# Altium PCB MacroPlay.PcbDoc
Units mm, origin at the board's own origin, x right, y up, seen from the top; angles counter-clockwise.
Board outline 96 x 80 mm, 2 copper layers (Top Layer, Bottom Layer), stack 1.569 mm thick; 89 components, 46 nets, 325 pads, 39 vias.
Unrouted connection lines stored in the file: 18.
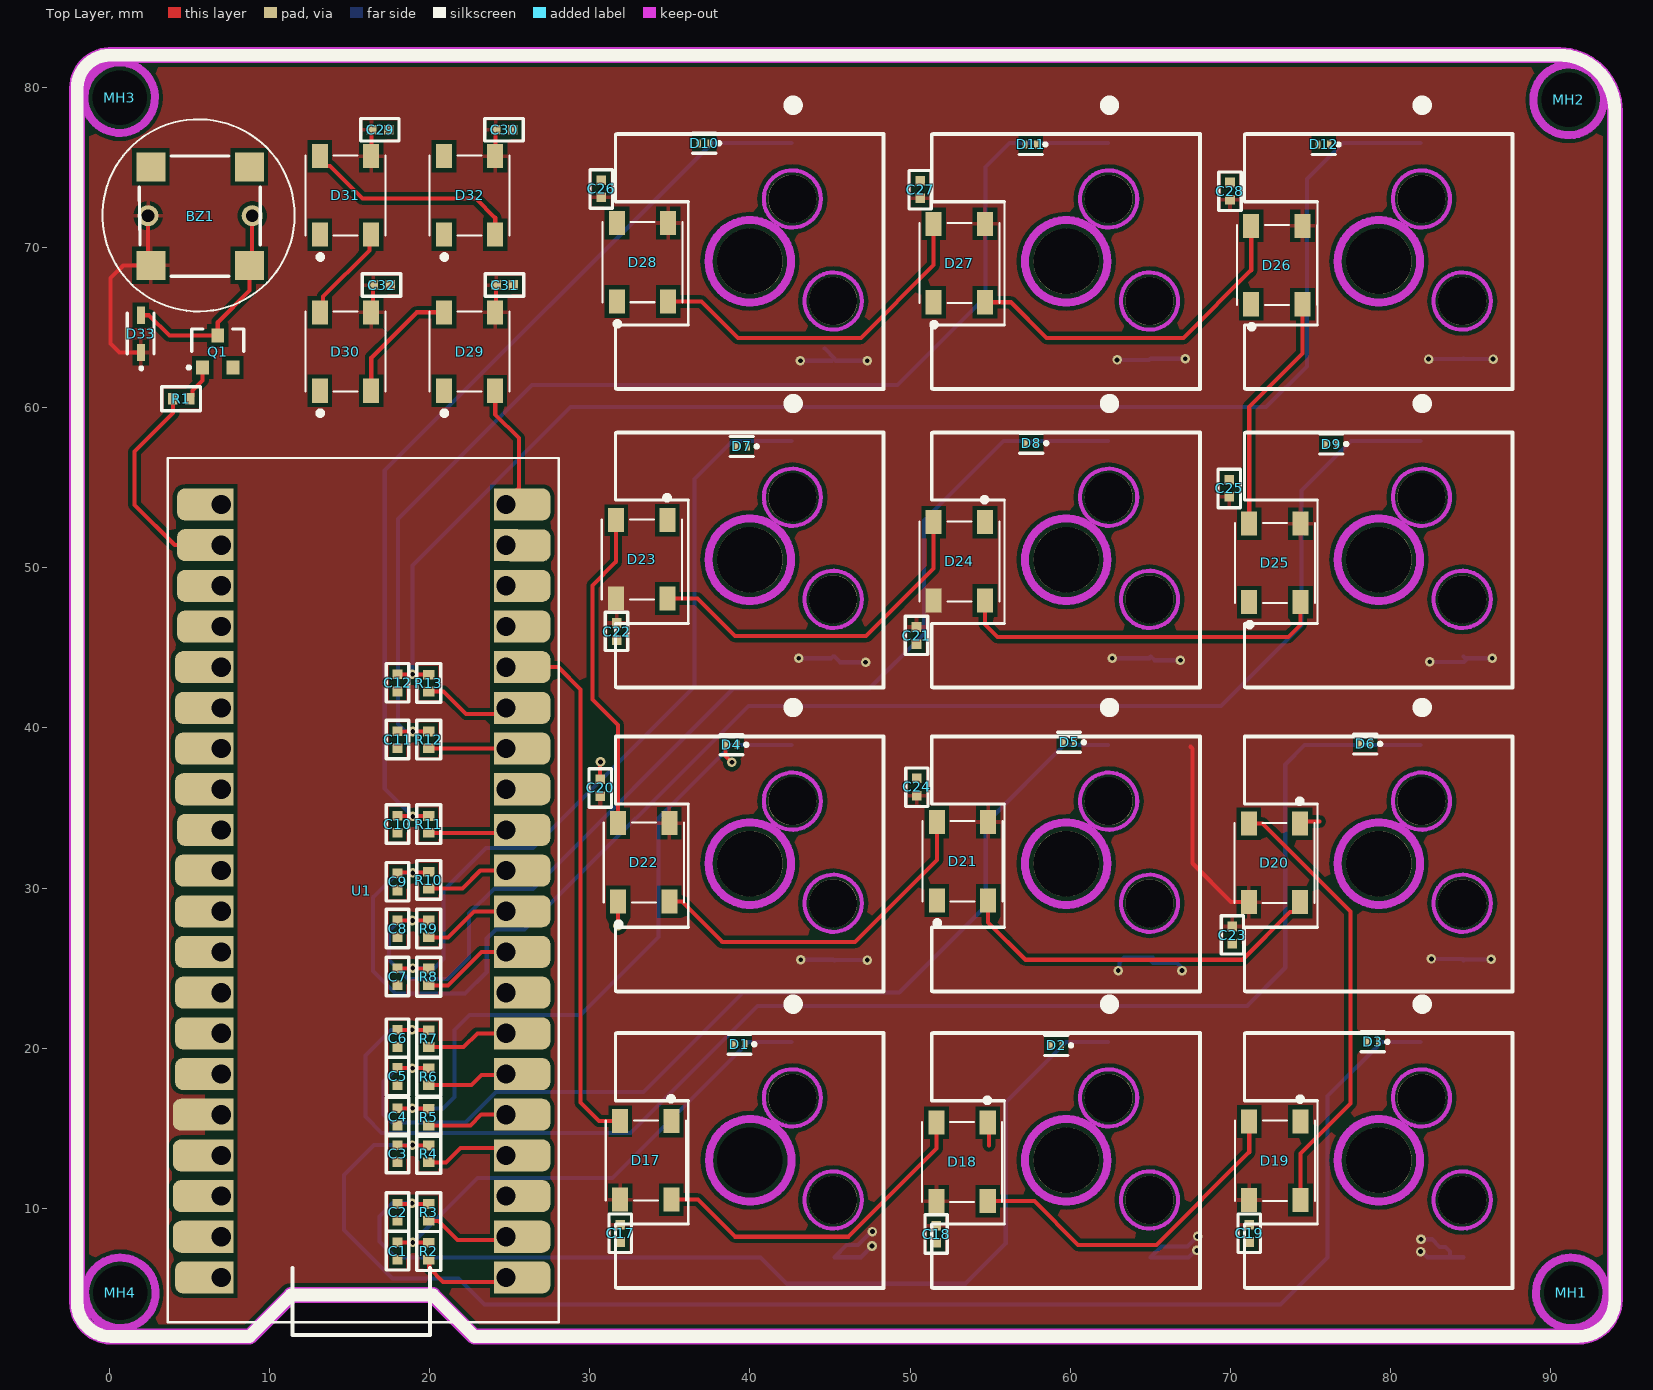
[diagram p0: Top Layer view]
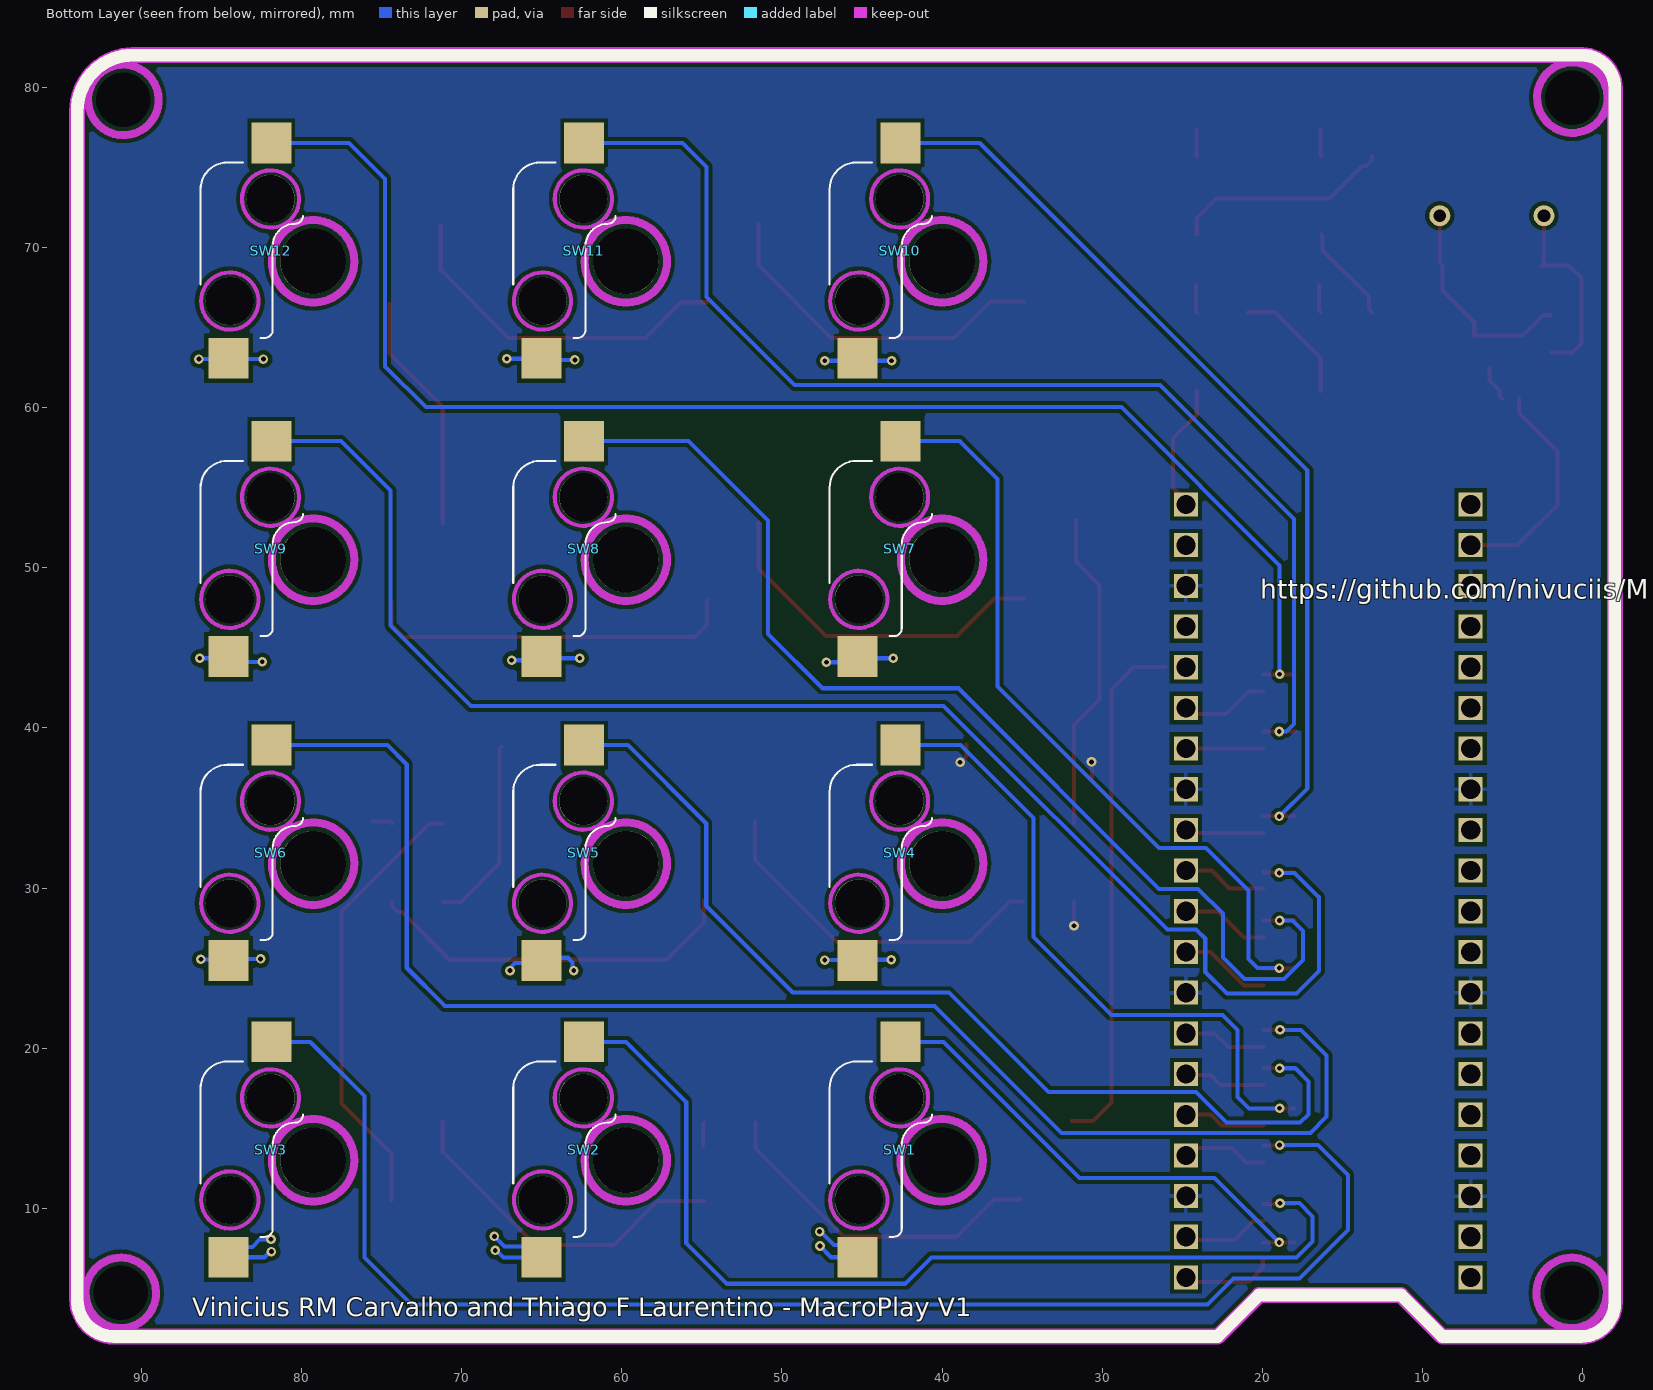
[diagram p1: Bottom Layer view, seen from below]

## Layer stack, top to bottom
Top Solder: solder mask 0.0102, Solder Resist, Dk 3.5
Top Layer: signal copper 0.035
Dielectric 1: core 1.4986, Core-043, Dk 4.3
Bottom Layer: signal copper 0.035
Bottom Solder: solder mask 0.0102, Solder Resist, Dk 3.5

## Board outline
0.125,2 7,2 8.766,2.001 11.355,4.591 20.209,4.591 22.799,2 25,2 91.7,2 ccw(c91.7,4.3) 94,4.3 94,78.525 ccw(c90.525,78.525) 90.525,82 0.05,82 ccw(c0.05,79.95) -2,79.95 -2,4.125 ccw(c0.125,4.125)

## Design rules (kind name [scope] priority, off if disabled: settings)
Clearance [All] p1: gap=0.254 ignorepadtopadclearanceinfootprint=FALSE except(0: Arc-Hole Track-Hole SMDPad-Hole THPad-Hole Via-Hole Fill-Hole Poly-Hole Region-Hole Text-Hole)
ComponentClearance TestPoints [HasFootprint('Test Point') vs HasFootprint('Test Point')] p1: gap=1.016 collisioncheckmode=3 verticalgap=0.254 showdistances=FALSE
ComponentClearance [All] p2: gap=0.254 collisioncheckmode=3 verticalgap=0.254 showdistances=FALSE
HoleSize [All] p1: absolutevalues=TRUE maxlimit=10 minlimit=0.025 maxpercent=80.000 minpercent=20.000
PolygonConnect "Relief 2312" [(HasFootprint('C2312') OR HasFootprint('R2312')OR HasFootprint('L2312')) AND IsPad vs IsPolygon] p1: thpad.connectstyle=Relief thpad.reliefconductorwidth=1.5 thpad.reliefentries=4 thpad.polygonreliefangle="90 Angle" thpad.airgapwidth=0.2 smdpad.connectstyle=Relief smdpad.reliefconductorwidth=1.5 smdpad.reliefentries=4 smdpad.polygonreliefangle="90 Angle" smdpad.airgapwidth=0.2 via.connectstyle=Direct via.reliefconductorwidth=0.254 via.reliefentries=4 via.polygonreliefangle="90 Angle" via.airgapwidth=0.254
PolygonConnect "Relief 1206" [(HasFootprint('C1206') OR HasFootprint('R1206') or HasFootprint('L1206')) AND IsPad vs IsPolygon] p2: thpad.connectstyle=Relief thpad.reliefconductorwidth=1.1 thpad.reliefentries=4 thpad.polygonreliefangle="90 Angle" thpad.airgapwidth=0.2 smdpad.connectstyle=Relief smdpad.reliefconductorwidth=1.1 smdpad.reliefentries=4 smdpad.polygonreliefangle="90 Angle" smdpad.airgapwidth=0.2 via.connectstyle=Direct via.reliefconductorwidth=0.254 via.reliefentries=4 via.polygonreliefangle="90 Angle" via.airgapwidth=0.254
PolygonConnect "Relief 0806" [(HasFootprint('C0805') OR HasFootprint('R0805') OR HasFootprint('L0805')) AND IsPad vs IsPolygon] p3: thpad.connectstyle=Relief thpad.reliefconductorwidth=0.7 thpad.reliefentries=4 thpad.polygonreliefangle="90 Angle" thpad.airgapwidth=0.254 smdpad.connectstyle=Relief smdpad.reliefconductorwidth=0.7 smdpad.reliefentries=4 smdpad.polygonreliefangle="90 Angle" smdpad.airgapwidth=0.254 via.connectstyle=Direct via.reliefconductorwidth=0.254 via.reliefentries=4 via.polygonreliefangle="90 Angle" via.airgapwidth=0.254
PolygonConnect "Relief 0603" [(HasFootprint('C0603') OR HasFootprint('R0603') OR HasFootprint('L0603')) AND IsPad vs IsPolygon] p4: thpad.connectstyle=Relief thpad.reliefconductorwidth=0.5 thpad.reliefentries=4 thpad.polygonreliefangle="90 Angle" thpad.airgapwidth=0.254 smdpad.connectstyle=Relief smdpad.reliefconductorwidth=0.5 smdpad.reliefentries=4 smdpad.polygonreliefangle="90 Angle" smdpad.airgapwidth=0.254 via.connectstyle=Direct via.reliefconductorwidth=0.254 via.reliefentries=4 via.polygonreliefangle="90 Angle" via.airgapwidth=0.254
PolygonConnect "Relief 0402" [(HasFootprint('C0402') OR HasFootprint('R0402') OR HasFootprint('L0402')) AND IsPad vs IsPolygon] p5: thpad.connectstyle=Relief thpad.reliefconductorwidth=0.3 thpad.reliefentries=4 thpad.polygonreliefangle="90 Angle" thpad.airgapwidth=0.127 smdpad.connectstyle=Relief smdpad.reliefconductorwidth=0.3 smdpad.reliefentries=4 smdpad.polygonreliefangle="90 Angle" smdpad.airgapwidth=0.127 via.connectstyle=Direct via.reliefconductorwidth=0.254 via.reliefentries=4 via.polygonreliefangle="90 Angle" via.airgapwidth=0.254
PolygonConnect [All] p6: thpad.connectstyle=Relief thpad.reliefconductorwidth=0.254 thpad.reliefentries=4 thpad.polygonreliefangle="90 Angle" thpad.airgapwidth=0.254 smdpad.connectstyle=Relief smdpad.reliefconductorwidth=0.254 smdpad.reliefentries=4 smdpad.polygonreliefangle="90 Angle" smdpad.airgapwidth=0.254 via.connectstyle=Direct via.reliefconductorwidth=0.254 via.reliefentries=4 via.polygonreliefangle="90 Angle" via.airgapwidth=0.254
RoutingVias [All] p1: holewidth=0.3 width=0.6 viastyle="Through Hole" minholewidth=0.3 minwidth=0.6 maxholewidth=8 maxwidth=10
SilkToSilkClearance SilkToSilkClearance_textOnTop [OnLayer('Bottom Overlay') vs (IsText OR IsTrack) AND OnLayer('Bottom Overlay')] p1: silktosilkclearance=0
SilkToSilkClearance [All] p2: silktosilkclearance=0.254
SilkToSolderMaskClearance [IsPad] p1: minsilkscreentomaskgap=0.16 clearancetoexposedcopper=TRUE
SolderMaskExpansion [All] p1: expansion=0.102 istentingtop=FALSE
SupplyNets "Schematic Supply Nets_1" [InNet('+3V3')] p1: voltage=0.000
SupplyNets "Schematic Supply Nets" [InNet('GND')] p2: voltage=0.000
Width [All] p1: maxlimit=0.254 minlimit=0.254 preferedwidth=0.254
26 further rules are at their usual default settings.

## Classes and differential pairs
component class "[05] - LEDS": C17 C18 C19 C20 C21 C22 C23 C24 C25 C26 C27 C28 C29 C30 C31 C32 D17 D18 D19 D20 D21 D22 D23 D24 D25 D26 D27 D28 D29 D30 D31 D32
component class "[04] - KEYS": C1 C2 C3 C4 C5 C6 C7 C8 C9 C10 C11 C12 D1 D2 D3 D4 D5 D6 D7 D8 D9 D10 D11 D12 R2 R3 R4 R5 R6 R7 R8 R9 R10 R11 R12 R13 SW1 SW2 SW3 SW4 SW5 SW6 SW7 SW8 SW9 SW10 SW11 SW12
component class "[03] - MICROCONTROLLER": BZ1 D33 Q1 R1 U1

## Components (designator, comment, footprint, x,y, rotation, side; value= is the part's Value field where it differs from the comment)
BZ1 "CMT-7525-80-SMT-TR" CMT752580SMTTR 5.65,71.95 r90 top
C1 "1µF/16V" "C0402 - IRON SOLDERING" 18,7.35 r90 top value=1uF
C2 "1µF/16V" "C0402 - IRON SOLDERING" 18,9.775 r90 top value=1uF
C3 "1µF/16V" "C0402 - IRON SOLDERING" 18,13.425 r90 top value=1uF
C4 "1µF/16V" "C0402 - IRON SOLDERING" 18,15.725 r90 top value=1uF
C5 "1µF/16V" "C0402 - IRON SOLDERING" 18,18.25 r90 top value=1uF
C6 "1µF/16V" "C0402 - IRON SOLDERING" 18,20.625 r90 top value=1uF
C7 "1µF/16V" "C0402 - IRON SOLDERING" 18,24.475 r90 top value=1uF
C8 "1µF/16V" "C0402 - IRON SOLDERING" 18,27.475 r90 top value=1uF
C9 "1µF/16V" "C0402 - IRON SOLDERING" 18,30.4 r90 top value=1uF
C10 "1µF/16V" "C0402 - IRON SOLDERING" 18,34 r90 top value=1uF
C11 "1µF/16V" "C0402 - IRON SOLDERING" 18,39.275 r90 top value=1uF
C12 "1µF/16V" "C0402 - IRON SOLDERING" 18,42.825 r90 top value=1uF
C17 "100nF/10V" "C0402 - IRON SOLDERING" 31.9,8.45 r90 top value=100nF
C18 "100nF/10V" "C0402 - IRON SOLDERING" 51.625,8.4 r90 top value=100nF
C19 "100nF/10V" "C0402 - IRON SOLDERING" 71.175,8.45 r90 top value=100nF
C20 "100nF/10V" "C0402 - IRON SOLDERING" 30.65,36.25 r270 top value=100nF
C21 "100nF/10V" "C0402 - IRON SOLDERING" 50.4,45.775 r90 top value=100nF
C22 "100nF/10V" "C0402 - IRON SOLDERING" 31.675,46.025 r90 top value=100nF
C23 "100nF/10V" "C0402 - IRON SOLDERING" 70.125,27.075 r90 top value=100nF
C24 "100nF/10V" "C0402 - IRON SOLDERING" 50.425,36.3 r270 top value=100nF
C25 "100nF/10V" "C0402 - IRON SOLDERING" 69.925,54.95 r270 top value=100nF
C26 "100nF/10V" "C0402 - IRON SOLDERING" 30.725,73.65 r270 top value=100nF
C27 "100nF/10V" "C0402 - IRON SOLDERING" 50.625,73.6 r270 top value=100nF
C28 "100nF/10V" "C0402 - IRON SOLDERING" 69.975,73.5 r270 top value=100nF
C29 "100nF/10V" "C0402 - IRON SOLDERING" 16.9,77.35 r180 top value=100nF
C30 "100nF/10V" "C0402 - IRON SOLDERING" 24.65,77.35 r180 top value=100nF
C31 "100nF/10V" "C0402 - IRON SOLDERING" 24.675,67.65 r180 top value=100nF
C32 "100nF/10V" "C0402 - IRON SOLDERING" 17,67.65 r180 top value=100nF
D1 "ESD321DPYR" ESD321DPYR 39.35,20.25 r180 top
D2 "ESD321DPYR" ESD321DPYR 59.125,20.175 r180 top
D3 "ESD321DPYR" ESD321DPYR 78.875,20.4 r180 top
D4 "ESD321DPYR" ESD321DPYR 38.85,38.95 r180 top
D5 "ESD321DPYR" ESD321DPYR 59.925,39.1 r180 top
D6 "ESD321DPYR" ESD321DPYR 78.425,39 r180 top
D7 "ESD321DPYR" ESD321DPYR 39.5,57.575 r180 top
D8 "ESD321DPYR" ESD321DPYR 57.575,57.775 r180 top
D9 "ESD321DPYR" ESD321DPYR 76.3,57.725 r180 top
D10 "ESD321DPYR" ESD321DPYR 37.15,76.5 r180 top
D11 "ESD321DPYR" ESD321DPYR 57.525,76.425 r180 top
D12 "ESD321DPYR" ESD321DPYR 75.825,76.425 r180 top
D17 "FZ2812-5050" LED_FZ2812-5050 33.5,13 r270 top locked
D18 "FZ2812-5050" LED_FZ2812-5050 53.25,12.9 r270 top locked
D19 "FZ2812-5050" LED_FZ2812-5050 72.775,12.975 r270 top locked
D20 "FZ2812-5050" LED_FZ2812-5050 72.75,31.575 r270 top
D21 "FZ2812-5050" LED_FZ2812-5050 53.275,31.675 r90 top
D22 "FZ2812-5050" LED_FZ2812-5050 33.375,31.6 r90 top
D23 "FZ2812-5050" LED_FZ2812-5050 33.25,50.525 r270 top
D24 "FZ2812-5050" LED_FZ2812-5050 53.075,50.4 r270 top
D25 "FZ2812-5050" LED_FZ2812-5050 72.775,50.3 r90 top
D26 "FZ2812-5050" LED_FZ2812-5050 72.9,68.9 r90 top
D27 "FZ2812-5050" LED_FZ2812-5050 53.075,69.025 r90 top
D28 "FZ2812-5050" LED_FZ2812-5050 33.3,69.075 r90 top
D29 "FZ2812-5050" LED_FZ2812-5050 22.5,63.5 r90 top
D30 "FZ2812-5050" LED_FZ2812-5050 14.75,63.5 r90 top
D31 "FZ2812-5050" LED_FZ2812-5050 14.75,73.25 r90 top
D32 "FZ2812-5050" LED_FZ2812-5050 22.5,73.25 r90 top
D33 "1N4148WS-7-F" SOD2513X120N 1.975,64.6 r90 top
MH1 "MH_7.4MMC_3.2MMD" MH_7.4MMC_3.2MMD#1 91.275,4.725 r0 top
MH2 "MH_7.4MMC_3.2MMD" MH_7.4MMC_3.2MMD#2 93.941,79.204 r0 top
MH3 "MH_7.4MMC_3.2MMD" MH_7.4MMC_3.2MMD#3 1.9,81.875 r0 top
MH4 "MH_7.4MMC_3.2MMD" MH_7.4MMC_3.2MMD#4 -0.225,5.8 r0 top
Q1 "BC848BLT1G" SOT-23-3 6.775,63.5 r90 top
R1 "200R" "R0402 - IRONSOLDER" 4.5,60.55 r0 top
R2 "10K" "R0402 - IRONSOLDER" 19.95,7.325 r270 top value=10kR
R3 "10K" "R0402 - IRONSOLDER" 19.95,9.75 r270 top value=10kR
R4 "10K" "R0402 - IRONSOLDER" 19.95,13.4 r270 top value=10kR
R5 "10K" "R0402 - IRONSOLDER" 19.95,15.7 r270 top value=10kR
R6 "10K" "R0402 - IRONSOLDER" 19.95,18.225 r270 top value=10kR
R7 "10K" "R0402 - IRONSOLDER" 19.95,20.6 r270 top value=10kR
R8 "10K" "R0402 - IRONSOLDER" 19.95,24.45 r270 top value=10kR
R9 "10K" "R0402 - IRONSOLDER" 19.95,27.45 r270 top value=10kR
R10 "10K" "R0402 - IRONSOLDER" 19.95,30.5 r270 top value=10kR
R11 "10K" "R0402 - IRONSOLDER" 19.95,33.975 r270 top value=10kR
R12 "10K" "R0402 - IRONSOLDER" 19.95,39.25 r270 top value=10kR
R13 "10K" "R0402 - IRONSOLDER" 19.95,42.8 r270 top value=10kR
SW1 "PG151101S11" SW_PG151101S11#1 43.925,13.675 r90 top locked
SW2 "PG151101S11" SW_PG151101S11#2 63.675,13.675 r90 top locked
SW3 "PG151101S11" SW_PG151101S11#2 83.2,13.675 r90 top locked
SW4 "PG151101S11" SW_PG151101S11#2 43.925,32.2 r90 top locked
SW5 "PG151101S11" SW_PG151101S11#2 63.675,32.2 r90 top locked
SW6 "PG151101S11" SW_PG151101S11#2 83.2,32.2 r90 top locked
SW7 "PG151101S11" SW_PG151101S11#2 43.925,51.175 r90 top locked
SW8 "PG151101S11" SW_PG151101S11#2 63.675,51.175 r90 top locked
SW9 "PG151101S11" SW_PG151101S11#2 83.2,51.175 r90 top locked
SW10 "PG151101S11" SW_PG151101S11#2 43.925,69.8 r90 top locked
SW11 "PG151101S11" SW_PG151101S11#2 63.675,69.8 r90 top locked
SW12 "PG151101S11" SW_PG151101S11#2 83.2,69.8 r90 top locked
U1 "RASPBERRY_PI_PICO" RASPBERRY_PI_PICO 15.89,28.55 r180 top locked

## Footprints (in the part's own frame and the unit in brackets; to place one, negate y for a bottom-side part, rotate by r counter-clockwise, add the part's x,y. Pads: shape width x height; smd on the part's side, far side on the other; paste and mask are expansions set on the pad)
"C0402 - IRON SOLDERING" [mm] "C0402 but easier to solder with iron solder instead of an furnace or heat bed"
  rect 0.6x0.6 smd mask+0: 1(-0.55,0) 2(0.525,0)
  silkscreen extent -1.2,-0.7 1.2,0.7, body extent -0.5,-0.25 0.5,0.25, height 0.51
CMT752580SMTTR [mm]
  rect 1.8x1.8 smd mask+0.08: 1(-3.075,3.05) 2(-3.075,-3.1) 3(3.075,-3.1) 4(3.075,3.05)
  round 1.308 hole 0.8 mask+0.102: 1(0.03,3.224) 2(0.03,-3.276)
  silkscreen extent -5.95,-5.92 6.05,6.07, body extent -3.72,-3.8 3.78,3.7, height 2.5
ESD321DPYR [mm]
  rect 0.3x0.5 smd mask+0.051: 1(-0.35,0) 2(0.35,0)
  silkscreen extent -1.02,-0.63 0.72,0.63, body extent -0.5,-0.3 0.5,0.3, height 0.45
LED_FZ2812-5050 [mm]
  rect 1.5x1 smd mask+0.08: 1(-2.45,1.6) 2(-2.45,-1.6) 3(2.45,-1.6) 4(2.45,1.6)
  silkscreen extent -3.95,-2.5 2.5,2.5, body extent -2.7,-2.5 2.65,2.45, height 1.5
MH_7.4MMC_3.2MMD#1 [mm]
  round 0 hole 3.4 unplated: ""(0,0)
MH_7.4MMC_3.2MMD#2 [mm]
  round 0 hole 3.4 unplated: ""(-2.825,0)
MH_7.4MMC_3.2MMD#3 [mm]
  round 0 hole 3.4 unplated: ""(-1.25,-2.525)
MH_7.4MMC_3.2MMD#4 [mm]
  round 0 hole 3.4 unplated: ""(0.925,-1.075)
"R0402 - IRONSOLDER" [mm] "R0402 but easier to solder with iron solder instead of an furnace or heat bed"
  rect 0.6x0.7 smd mask+0: 1(-0.525,0) 2(0.525,0)
  silkscreen extent -1.22,-0.75 1.2,0.75, body extent -0.5,-0.25 0.5,0.25, height 0.41
RASPBERRY_PI_PICO [mm]
  rect 1.508x2 / inner round 1.508 / far side rect 1.508x1.508 hole 1.2 mask+0.1: 3V3(8.89,12.7) 3V3_EN(8.89,15.24) ADC_VREF(8.89,10.16) AGND(8.89,5.08) GND(-8.89,17.78) GND(-8.89,5.08) GND(-8.89,-7.62) GND(-8.89,-20.32) GND(8.89,17.78) GND(8.89,-7.62) GND(8.89,-20.32) GP0(-8.89,22.86) GP1(-8.89,20.32) GP2(-8.89,15.24) GP3(-8.89,12.7) GP4(-8.89,10.16) GP5(-8.89,7.62) GP6(-8.89,2.54) GP7(-8.89,0) GP8(-8.89,-2.54) GP9(-8.89,-5.08) GP10(-8.89,-10.16) GP11(-8.89,-12.7) GP12(-8.89,-15.24) GP13(-8.89,-17.78) GP14(-8.89,-22.86) GP15(-8.89,-25.4) GP16(8.89,-25.4) GP17(8.89,-22.86) GP18(8.89,-17.78) GP19(8.89,-15.24) GP20(8.89,-12.7) GP21(8.89,-10.16) GP22(8.89,-5.08) GP26_A0(8.89,0) GP27_A1(8.89,2.54) GP28_A2(8.89,7.62) RUN(8.89,-2.54) VBUS(8.89,22.86) VSYS(8.89,20.32)
  rrect50% 3x2 smd mask+0.1: 3V3(10.41,12.7) 3V3_EN(10.41,15.24) ADC_VREF(10.283,10.16) AGND(10.283,5.08) GND(-10.156,17.78) GND(-10.156,5.08) GND(-10.156,-7.62) GND(-10.156,-20.32) GND(10.156,-20.32) GND(10.283,-7.62) GND(10.41,17.78) GP0(-10.156,22.86) GP1(-10.156,20.32) GP2(-10.156,15.24) GP3(-10.156,12.7) GP4(-10.156,10.16) GP5(-10.156,7.62) GP6(-10.156,2.54) GP7(-10.156,0) GP8(-10.156,-2.54) GP9(-10.156,-5.08) GP10(-10.156,-10.16) GP11(-10.156,-12.7) GP12(-10.156,-15.24) GP13(-10.156,-17.78) GP14(-10.175,-22.85) GP15(-10.156,-25.4) GP16(10.156,-25.4) GP17(10.156,-22.86) GP18(10.156,-17.78) GP19(10.283,-15.24) GP20(10.283,-12.7) GP21(10.283,-10.16) GP22(10.156,-5.08) GP26_A0(10.283,0) GP27_A1(10.283,2.54) GP28_A2(10.283,7.62) RUN(10.283,-2.54) VBUS(10.283,22.86) VSYS(10.41,20.32)
  silkscreen extent -12.18,-28.3 12.25,26.45, body extent -10.46,-26.77 10.54,25.53, height 5.73
SOD2513X120N [mm]
  rect 1.075x0.5 smd mask+0.05: 1(-1.162,0) 2(1.162,0)
  silkscreen extent -2.21,-0.82 1.3,0.85, body extent -1.26,-0.65 1.26,0.65, height 1.11
SOT-23-3 [mm] "SOT23, 3-Leads, Body 2,90x2,40mm, Pitch 1,05mm, IPC Medium Density"
  rect 0.9x0.8 smd mask+0.08: 1(-1,0.95) 2(-1,-0.95) 3(1,0)
  silkscreen extent -1.1,-1.62 1.4,1.9, body extent -1.27,-1.5 1.28,1.5, height 1.15
SW_PG151101S11#1 [mm]
  rect 2.55x2.5 smd far side: 1(6.725,1.325) 2(-6.725,-1.35)
  round 3 hole 3 unplated: ""(-3.15,-1.275) ""(3.225,1.275)
  round 0 hole 4.089 unplated: ""(-0.675,3.925)
  silkscreen extent -8.65,-4.43 9.17,12.33, body extent -8.5,-4.15 7.25,11.95, height 15.98
SW_PG151101S11#2 [mm]
  rect 2.55x2.5 smd far side: 1(6.725,1.325) 2(-6.725,-1.35)
  round 3 hole 3 unplated: ""(-3.15,-1.275) ""(3.225,1.275)
  round 4.089 hole 4.089 unplated: ""(-0.675,3.925)
  silkscreen extent -8.65,-4.43 9.17,12.33, body extent -8.5,-4.15 7.25,11.95, height 15.98

## Part data
BZ1: "BUZZER - Buzzers Transducer, Externally Driven Magnetic 3.6 V 100mA 2.73kHz 80dB @ 3.6V, 10cm Surface Mount Solder Pads", Manufacturer_Name="Same Sky", Mouser Part Number=490-CMT-7525-80SMTTR, Arrow Part Number=CMT-7525-80-SMT-TR, Arrow Price/Stock=https://www.arrow.com/en/products/cmt-7525-80-smt-tr/cui-devices?region=nac, Datasheet Link=https://www.sameskydevices.com/product/resource/CMT-7525-80-SMT-TR.pdf, Height=2.7mm, Manufacturer_Part_Number=CMT-7525-80-SMT-TR, Mouser Price/Stock=https://www.mouser.co.uk/ProductDetail/Same-Sky/CMT-7525-80-SMT-TR?qs=P1JMDcb91o5izP7Xira9ww%3D%3D
C1 C2 C3 C4 C5 C6 C7 C8 C9 C10 C11 C12: library part EMK105BJ105KV-F, "MLCC - 1µF 16V 0402 X5R ±10%.", Capacitor Type=Ceramic, Case/Package=0402, Manufacturer 1="Taiyo Yuden", Max Operating Temperature=85°C, Min Operating Temperature=-55°C, Package Shape=Rectangular, Package Style=SMTMeter, Rated DC Voltage (URdc)=16V, Supplier Part Number 1=84R9109, Temperature Characteristics Code=X5R, Tolerance  (fill in as +-)=10%, .Mounting=SMT, Category="Ceramic Capacitors", ComponentLink1Description=https://datasheet.ciiva.com:443/pdfs/VipMasterIC/IC/TAIY/TAIY-S-A0009096450/TAIY-S-A0009096597-1.pdf?src-supplier=IHS+Markit, ComponentLink1URL=https://datasheet.ciiva.com:443/pdfs/VipMasterIC/IC/TAIY/TAIY-S-A0009096450/TAIY-S-A0009096597-1.pdf?src-supplier=IHS+Markit, ComponentLink2Description=https://datasheet.ciiva.com/134/emk105bj105kv-f-ss-134209.pdf?src-supplier=Digikey, ComponentLink2URL=https://datasheet.ciiva.com/134/emk105bj105kv-f-ss-134209.pdf?src-supplier=Digikey, ComponentLink3Description=https://datasheet.ciiva.com/30259/265emk105bj105kv-f-30259872.pdf?src-supplier=Onlinecomponents.com, ComponentLink3URL=https://datasheet.ciiva.com/30259/265emk105bj105kv-f-30259872.pdf?src-supplier=Onlinecomponents.com, ComponentLink4Description=https://datasheet.ciiva.com/15920/964emk105bj105kv-f-15920402.pdf?src-supplier=Onlinecomponents.com, ComponentLink4URL=https://datasheet.ciiva.com/15920/964emk105bj105kv-f-15920402.pdf?src-supplier=Onlinecomponents.com, ComponentLink5Description=https://datasheet.ciiva.com/26871/getdatasheetpartid-638287-26871289.pdf?src-supplier=Verical, ComponentLink5URL=https://datasheet.ciiva.com/26871/getdatasheetpartid-638287-26871289.pdf?src-supplier=Verical, ComponentLink6Description=https://datasheet.ciiva.com/5424/mlcc01-e-5424190.pdf?src-supplier=Mouser, ComponentLink6URL=https://datasheet.ciiva.com/5424/mlcc01-e-5424190.pdf?src-supplier=Mouser, ComponentLink7Description=https://datasheet.ciiva.com/22694/1497285-22694239.pdf?src-supplier=Element14, ComponentLink7URL=https://datasheet.ciiva.com/22694/1497285-22694239.pdf?src-supplier=Element14, ComponentLink8Description=https://datasheet.ciiva.com/7657/1497285-7657320.pdf?src-supplier=Element14, ComponentLink8URL=https://datasheet.ciiva.com/7657/1497285-7657320.pdf?src-supplier=Element14, Dielectric Material=Ceramic, Height=0.5mm, JESD-609 Code=e3, Length=1mm, Manufacturer Part Number 1=EMK105BJ105KV-F, Mounting Technology="Surface Mount", Multilayer=Yes, Packaging="Tape and Reel", Pins=2, Pricing="10000=0,007, 20000=0,008 (USD)", Reach SVHC Compliant=Yes, RoHS=Yes, RoHS Compliant=Yes, Stock=100000, Supplier 1=Avnet, Terminal Finish=Nickel, Termination=Wraparound, Tolerance (fill in as +-)=10%, Width=0.5mm
C17 C18 C19 C20 C21 C22 C23 C24 C25 C26 C27 C28 C29 C30 C31 C32: library part CL05B104KP5NNNC, "MLCC - 100nF 10V X7R 0402 ±10%", Capacitor Type=Ceramic, Case/Package=0402, Manufacturer 1=Samsung, Max Operating Temperature=125°C, Min Operating Temperature=-55°C, Package Shape=Rectangular, Package Style=SMTMeter, Rated DC Voltage (URdc)=10V, Supplier Part Number=1276-1002-1-ND, Temperature Characteristics Code=X7R, Tolerance  (fill in as +-)=10%, .Mounting=SMT, Category="Ceramic Capacitors", ComponentLink1Description=https://datasheet.ciiva.com:443/pdfs/VipMasterIC/IC/SEMS/SEMS-S-A0008523115/SEMS-S-A0008523129-1.pdf?src-supplier=IHS+Markit, ComponentLink1URL=https://datasheet.ciiva.com:443/pdfs/VipMasterIC/IC/SEMS/SEMS-S-A0008523115/SEMS-S-A0008523129-1.pdf?src-supplier=IHS+Markit, ComponentLink2Description=https://datasheet.ciiva.com/15165/getdatasheetpartid-37100-15165107.pdf?src-supplier=Verical, ComponentLink2URL=https://datasheet.ciiva.com/15165/getdatasheetpartid-37100-15165107.pdf?src-supplier=Verical, ComponentLink3Description=https://datasheet.ciiva.com/16498/cl05b104kq5nnnc-16498491.pdf?src-supplier=Future+Electronics, ComponentLink3URL=https://datasheet.ciiva.com/16498/cl05b104kq5nnnc-16498491.pdf?src-supplier=Future+Electronics, Dielectric Material=Ceramic, Height=0.5mm, JESD-609 Code=e3, Length=1mm, Manufacturer Part Number 1=CL05B104KP5NNNC, Mounting Technology="Surface Mount", Multilayer=Yes, Packaging="Tape and Reel", Pins=2, Pricing="1=0,08, 10=0,004, 100=0,0036, 1000=0,0032 (USD)", Reach SVHC Compliant=Yes, RoHS=Yes, RoHS Compliant=Yes, Stock=29591550, Supplier=Digikey, Terminal Finish=Nickel, Termination=Wraparound, Tolerance (fill in as +-)=10%, Width=0.5mm
D1 D2 D3 D4 D5 D6 D7 D8 D9 D10 D11 D12: "DIODE - TVS UNI-DIR 3.6V, 4.5V, 6.8V, 6A, 0.9pF.", Manufacturer 1="Texas Instruments", Manufacturer 3="Panjit International Inc.", Manufacturer Part Number 2=ESD351DPYR, Manufacturer Part Number 3=PE1605M1Q_R1_00001, Supplier Part Number 1=296-51108-1-ND, .Mounting=SMT, .Mouting=SMT, .PCBChecked="Lucas Vieira", .SCHChecked="Lucas Vieira", Category 1="TVS Diodes", ComponentLink1Description=http://www.ti.com/general/docs/suppproductinfo.tsp?distId=10&amp;gotoUrl=http%3A%2F%2Fwww.ti.com%2Flit%2Fgpn%2Fesd321&src-supplier=Digi-Key, ComponentLink1URL=http://www.ti.com/general/docs/suppproductinfo.tsp?distId=10&amp;gotoUrl=http%3A%2F%2Fwww.ti.com%2Flit%2Fgpn%2Fesd321&src-supplier=Digi-Key, Description 1="ESD Suppressor Diode TVS Uni-Dir 3.6V 2-Pin X1SON T/R", Manufacturer 2="Texas Instruments", Manufacturer Part Number 1=ESD321DPYR, Pricing 1="1=0,37000, 10=0,29900, 100=0,20350, 500=0,15264, 1000=0,11448, 2000=0,10494, 5000=0,09858 (USD)", RoHS 1=Yes, RoHS Compliant=Yes, Stock 1=172519, Supplier 1=Digi-Key
D17 D18 D19 D20 D21 D22 D23 D24 D25 D26 D27 D28 D29 D30 D31 D32: "DIODE - Addressable Lighting * 3 LED Discrete Serial Red, Green, Blue (RGB) 5.00mm L x 5.00mm W", Package=None, .Mounting=SMD, Availability="In Stock", Check_prices=https://www.snapeda.com/parts/FZ2812-5050/E%2526E/view-part/?ref=eda, MF=Feztek, MP=FZ2812-5050, Price=None, Purchase-URL=https://pricing.snapeda.com/search?q=FZ2812-5050&ref=eda, SnapEDA_Link=https://www.snapeda.com/parts/FZ2812-5050/E%2526E/view-part/?ref=snap
D33: "DIODE - Diode 75 V 150mA Surface Mount SOD-323", Manufacturer_Name="Diodes Incorporated", Mouser Part Number=621-1N4148WS-F, Arrow Part Number=1N4148WS-7-F, Arrow Price/Stock=https://www.arrow.com/en/products/1n4148ws-7-f/diodes-incorporated?utm_currency=USD&region=europe, Datasheet Link=https://www.diodes.com//assets/Datasheets/1N4148WS_BAV16WS.pdf, Height=1.2mm, Manufacturer_Part_Number=1N4148WS-7-F, Mouser Price/Stock=https://www.mouser.co.uk/ProductDetail/Diodes-Incorporated/1N4148WS-7-F?qs=4drIV0IxA0r8aNy7%2Fu4kVw%3D%3D
MH1 MH2 MH3 MH4: "Mounting Hole 7.4mm Diameter 3.2mm Drill"
Q1: "TRANS - NPN 30V 100mA 300mW SOT23-3.", Case/Package=SOT-23-3, Clock Frequency=100MHz, Collector Base Voltage (VCBO)=30V, Collector Emitter Saturation Voltage=600mV, Current Rating=100mA, Emitter Base Voltage (VEBO)=5V, Manufacturer 1="ON Semiconductor", Manufacturer 3="Nexperia USA Inc.", Manufacturer Part Number 2=SBC848BLT1G, Manufacturer Part Number 3=BC848B,215, Max Operating Temperature=150°C, Max Power Dissipation=300mW, Min Operating Temperature=-55°C, Package Quantity=3000, Supplier Part Number 1=BC848BLT1GOSCT-ND, .Mounting=SMT, .PCBChecked="Lucas Vieira", .SCHChecked="Lucas Vieira", Category 1=BJTs, Collector Emitter Breakdown Voltage=30V, Collector Emitter Voltage (VCEO)=30V, Collector-emitter Voltage-Max=600mV, ComponentLink1Description=https://datasheet.ciiva.com/15139/getdatasheetpartid-87781-15139134.pdf?src-supplier=Verical, ComponentLink1URL=https://datasheet.ciiva.com/15139/getdatasheetpartid-87781-15139134.pdf?src-supplier=Verical, ComponentLink2Description=https://datasheet.ciiva.com/7971/bc846alt1-d-7971962.pdf?src-supplier=Element14, ComponentLink2URL=https://datasheet.ciiva.com/7971/bc846alt1-d-7971962.pdf?src-supplier=Element14, ComponentLink3Description=https://datasheet.ciiva.com/7971/bc846alt1-d-7971960.pdf?src-supplier=Element14, ComponentLink3URL=https://datasheet.ciiva.com/7971/bc846alt1-d-7971960.pdf?src-supplier=Element14, ComponentLink4Description=https://datasheet.ciiva.com/11204/bc846alt1-d-11204358.pdf?src-supplier=Avnet, ComponentLink4URL=https://datasheet.ciiva.com/11204/bc846alt1-d-11204358.pdf?src-supplier=Avnet, ComponentLink5Description=https://datasheet.ciiva.com/11198/bc846alt1-d-11198026.pdf?src-supplier=Avnet, ComponentLink5URL=https://datasheet.ciiva.com/11198/bc846alt1-d-11198026.pdf?src-supplier=Avnet, ComponentLink6Description=https://datasheet.ciiva.com/976/bc846alt1-d-976387.pdf?src-supplier=Digi-Key, ComponentLink6URL=https://datasheet.ciiva.com/976/bc846alt1-d-976387.pdf?src-supplier=Digi-Key, ComponentLink7Description=https://datasheet.ciiva.com/976/bc846alt1-d-976388.pdf?src-supplier=Digi-Key, ComponentLink7URL=https://datasheet.ciiva.com/976/bc846alt1-d-976388.pdf?src-supplier=Digi-Key, ComponentLink8Description=https://datasheet.ciiva.com/976/bc846alt1-d-976386.pdf?src-supplier=Digi-Key, ComponentLink8URL=https://datasheet.ciiva.com/976/bc846alt1-d-976386.pdf?src-supplier=Digi-Key, Contact Plating=Tin,Matte, Description 1="NPN Ic=100mA Vceo=30V hfe=200~450 P=225mW SOT-23", Frequency=100MHz, Gain Bandwidth Product=100MHz, Height=0.94mm, hFE Min=200, Lead Free="Lead Free", Length=2.9mm, Manufacturer 2="ON Semiconductor", Manufacturer Part Number 1=BC848BLT1G, Max Breakdown Voltage=30V, Max Collector Current=100mA, Number of Elements=1, Packaging="Tape and Reel", Pins=3, Polarity=NPN, Power Dissipation=300mW, Pricing 1="1=0,14, 10=0,131, 100=0,0712, 500=0,04384, 1000=0,02989 (USD)", Radiation Hardening=No, Reach SVHC Compliant=No, RoHS 1=Yes, RoHS Compliant=Yes, Series=-, Stock 1=199953, Supplier 1=Digi-Key, Transition Frequency=100MHz, Voltage Rating (DC)=30V, Width=1.3mm
R1: library part RT0402BRD07200RL, "RES - 200R  0.0625W 0402 0.1%  50V Fixed Resistor, Thin Film", Case/Package=0402, Manufacturer 1=Yageo, Max Operating Temperature=155°C, Min Operating Temperature=-55°C, Package Height=0.3mm, Package Length=1mm, Package Width=0.5mm, Power=62.5mW, Rated Temperature=70°C, Resistor Type="FIXED RESISTOR", Supplier Part Number=49AK4062, Temperature Coefficient (ppm/Cel)=25, Tolerance=0.1%, Working Voltage=50V, .Mounting=SMT, Additional Feature="HIGH PRECISION", Category="Chip SMD Resistors", ComponentLink1Description=https://datasheet.ciiva.com:443/pdfs/VipMasterIC/IC/YAGO/YAGO-S-A0008510989/YAGO-S-A0008510989-1.pdf?src-supplier=IHS+Markit, ComponentLink1URL=https://datasheet.ciiva.com:443/pdfs/VipMasterIC/IC/YAGO/YAGO-S-A0008510989/YAGO-S-A0008510989-1.pdf?src-supplier=IHS+Markit, ComponentLink2Description=https://datasheet.ciiva.com/12705/pyu-rt-1-to-0-05-rohs-l-4-12705967.pdf?src-supplier=Mouser, ComponentLink2URL=https://datasheet.ciiva.com/12705/pyu-rt-1-to-0-05-rohs-l-4-12705967.pdf?src-supplier=Mouser, ComponentLink3Description=https://datasheet.ciiva.com/46635/pyu-rt-1-to-0-05-rohs-l-5-46635174.pdf?src-supplier=Digikey, ComponentLink3URL=https://datasheet.ciiva.com/46635/pyu-rt-1-to-0-05-rohs-l-5-46635174.pdf?src-supplier=Digikey, ComponentLink4Description=https://datasheet.ciiva.com/2582/pyu-rt-1-to-0-05-rohs-l-4-2582220.pdf?src-supplier=Digikey, ComponentLink4URL=https://datasheet.ciiva.com/2582/pyu-rt-1-to-0-05-rohs-l-4-2582220.pdf?src-supplier=Digikey, Construction=Chip, Manufacturer Part Number 1=RT0402BRD07200RL, Mounting Technology="Surface Mount", Packaging="Tape and Reel", Pins=2, Pricing="1=0,198, 25=0,135, 100=0,098, 250=0,087, 500=0,077 (USD)", Reach SVHC Compliant=Yes, RoHS=Yes, RoHS Compliant=Yes, Stock=8493, Supplier=Avnet, Technology="THIN FILM", Termination=Wraparound
R2 R3 R4 R5 R6 R7 R8 R9 R10 R11 R12 R13: library part RC1005F103CS, "RES - 10K 1/16W 0402 ±1% Chip Resistor", Case/Package=0402, Manufacturer 1=Samsung, Max Operating Temperature=125°C, Min Operating Temperature=-55°C, Package Height=0.35mm, Package Length=1mm, Package Shape=Rectangular, Package Width=0.5mm, Power=60mW, Resistor Type="FIXED RESISTOR", Supplier Part Number=1276-3431-1-ND, Temperature Coefficient (ppm/Cel)=100, Tolerance=1%, Working Voltage=50V, .Mounting=SMT, Category="Chip SMD Resistors", ComponentLink1Description=https://datasheet.ciiva.com:443/pdfs/VipMasterIC/IC/SEMS/SEMS-S-A0001326806/SEMS-S-A0001326806-1.pdf?src-supplier=IHS+Markit, ComponentLink1URL=https://datasheet.ciiva.com:443/pdfs/VipMasterIC/IC/SEMS/SEMS-S-A0001326806/SEMS-S-A0001326806-1.pdf?src-supplier=IHS+Markit, ComponentLink2Description=https://datasheet.ciiva.com/15196/getdatasheetpartid-504789-15196214.pdf?src-supplier=Verical, ComponentLink2URL=https://datasheet.ciiva.com/15196/getdatasheetpartid-504789-15196214.pdf?src-supplier=Verical, ComponentLink3Description=https://datasheet.ciiva.com/16481/rcseries-16481007.pdf?src-supplier=Future+Electronics, ComponentLink3URL=https://datasheet.ciiva.com/16481/rcseries-16481007.pdf?src-supplier=Future+Electronics, Construction=Chip, JESD-609 Code=e3, Manufacturer Part Number 1=RC1005F103CS, Mounting Technology="Surface Mount", Packaging="Tape and Reel", Pins=2, Pricing="1=0,1, 10=0,039, 100=0,0201, 1000=0,01175, 2500=0,0099, 5000=0,00882 (USD)", Reach SVHC Compliant=Yes, RoHS=Yes, RoHS Compliant=Yes, Stock=10935408, Supplier=Digikey, Technology="METAL GLAZE/THICK FILM", Terminal Finish=Nickel
SW1 SW2 SW3 SW4 SW5 SW6 SW7 SW8 SW9 SW10 SW11 SW12: "SWITCH - Kailh socket for hotswap mechanical switches", Package=Package, .Mounting=SMD, Check_prices=https://www.snapeda.com/parts/PG151101S11/Kailh/view-part/?ref=eda, MF=Kailh, MP=PG151101S11, SnapEDA_Link=https://www.snapeda.com/parts/PG151101S11/Kailh/view-part/?ref=snap
U1: "MCU Module - Raspberry Pi Board, Arm Cortex-M0+; Core Architecture:Arm; Core Sub-Architecture:Cortex-M0+; Kit Contents:Raspberry Pi Pico Board; No. Of Bits:32Bit; Silicon Core Number:Rp2040; Silicon Manufacturer:Raspberry Pi", Package=None, .Mounting="SMD or PTH variant", Check_prices=https://www.snapeda.com/parts/RASPBERRY%20PI%20PICO/Raspberry+Pi/view-part/?ref=eda, MF="Raspberry Pi", MP="RASPBERRY PI PICO", SnapEDA_Link=https://www.snapeda.com/parts/RASPBERRY%20PI%20PICO/Raspberry+Pi/view-part/?ref=snap

## Via types
v1: diameter 0.6, hole 0.3, Top Layer to Bottom Layer, tented both sides, 39 vias

## Nets (pads, with @x,y where several pads share a name; then routed paths per layer and width w, separated by ;. In a path a pad name is that pad's centre, name@x,y a point inside that pad or via, vN(x,y) a via of type N, cw(c..) or ccw(c..) an arc to the next point about the centre after c; other vN are vias at no path point)
+3V3: BZ1.1 C17.2 C18.2 C19.2 C20.2 C21.2 C22.2 C23.2 C24.2 C25.2 C26.2 C27.2 C28.2 C29.2 C30.2 C31.2 C32.2 D17.3 D18.3 D19.3 D20.3 D21.3 D22.3 D23.3 D24.3 D25.3 D26.3 D27.3 D28.3 D29.3 D30.3 D31.3 D32.3 D33.1 SW1.2 SW2.2 SW3.2 SW4.2 SW5.2 SW6.2 SW7.2 SW8.2 SW9.2 SW10.2 SW11.2 SW12.2 U1.3V3 | length 87.4
  Top Layer w0.254: D33.1 0.637,63.438 0.075,64 0.075,68.075 0.875,68.875 2.6,68.875 2.426,69.049 BZ1.1@2.426,71.98 ; D30.3 16.475,66.075 C32.2 ; D31.3 16.375,75.725 C29.2 ; D29.3 24.15,66 C31.2 ; D32.3 24.125,75.725 C30.2 ; 67.5,38.825 67.625,38.7 67.625,31.55 70.05,29.125 D20.3
  Bottom Layer w0.254: v1(43.05,44.35) 45.075,44.35 SW7.2@45.175,44.45 ; v1(43.15,62.925) SW10.2@45.125,62.925 ; v1(43.175,25.525) SW4.2@45.175,25.525 ; SW10.2@44.675,63.675 SW10.2 ; SW10.2@45.237,63.037 45.35,62.925 v1(47.325,62.925) ; SW4.2 45.3,25.5 v1(47.325,25.5) ; SW7.2 45.625,44.1 v1(47.225,44.1) ; v1(47.625,7.65) 46.925,6.95 SW1.2 46.041,7.716 46.757,7.716 47.591,8.55 v1(47.65,8.55) ; v1(62.625,44.35) 64.95,44.35 SW8.2@65,44.4 ; v1(62.925,62.975) 64.925,62.975 SW11.2 ; v1(63,24.844) 63.066,24.91 63.066,25.366 63.35,25.65 SW5.2@65.175,25.65 ; SW2.2@65.025,6.925 67.387,6.925 67.837,7.375 v1(67.9,7.375) ; SW2.2 65.7,7.625 67.325,7.625 v1(67.95,8.25) ; SW5.2 65.175,25.325 66.656,25.325 66.909,25.072 66.909,24.91 v1(66.975,24.844) ; SW8.2 65.25,44.225 v1(66.875,44.225) ; SW11.2@65.025,63.05 v1(67.175,63.05) ; v1(81.875,7.3) 81.969,7.3 82.319,6.95 83.025,6.95 SW3.2@83.7,6.95 ; v1(81.9,8.075) 82.575,8.075 83.068,7.582 83.427,7.582 83.7,7.309 SW3.2@83.7,6.95 ; v1(82.375,63.025) SW12.2@84.55,63.025 ; v1(82.45,44.125) 84.575,44.125 SW9.2@84.725,44.275 ; v1(82.55,25.575) SW6.2@84.55,25.575 ; SW3.2 SW3.2@83.7,6.95 ; SW6.2 84.625,25.55 v1(86.275,25.55) ; SW9.2 84.65,44.35 v1(86.35,44.35) ; SW12.2 84.6,63.025 v1(86.4,63.025)
GND: C1.1 C2.1 C3.1 C4.1 C5.1 C6.1 C7.1 C8.1 C9.1 C10.1 C11.1 C12.1 C17.1 C18.1 C19.1 C20.1 C21.1 C22.1 C23.1 C24.1 C25.1 C26.1 C27.1 C28.1 C29.1 C30.1 C31.1 C32.1 D1.2 D2.2 D3.2 D4.2 D5.2 D6.2 D7.2 D8.2 D9.2 D10.2 D11.2 D12.2 D17.1 D18.1 D19.1 D20.1 D21.1 D22.1 D23.1 D24.1 D25.1 D26.1 D27.1 D28.1 D29.1 D30.1 D31.1 D32.1 Q1.2 U1.AGND U1.GND | length 6.6
  Top Layer w0.254: C20.1 30.65,37.875 v1(30.675,37.875) ; v1(31.767,27.643) 31.775,27.643 D22.1 ; D4.2 38.477,38.927 38.477,38.707 38.473,38.702 38.473,38.252 v1(38.875,37.85) ; D18.1 54.925,15.275 54.925,13.925 ; D20.1 74.475,34.15 75.575,34.15
NetBZ1_2: BZ1.2 D33.2 Q1.3 | length 13.7
  Top Layer w0.254: D33.2 2.488,65.762 3.75,64.5 Q1.3 6.775,65.325 8.75,67.3 8.75,68.875 8.926,69.051 BZ1.2@8.926,71.98
NetC1_2: C1.2 D1.1 R2.1 SW1.1 | length 30.8
  Top Layer w0.254: C1.2 18.012,7.862 19.938,7.862 R2.1
  Bottom Layer w0.254: v1(18.95,7.875) 22.98,11.905 31.43,11.905 39.925,20.4 SW1.1
NetC2_2: C2.2 D2.1 R3.1 SW2.1 | length 63.9
  Top Layer w0.254: C2.2 18.012,10.288 19.938,10.288 R3.1
  Bottom Layer w0.254: v1(18.9,10.325) 17.7,10.325 16.875,9.5 16.875,7.925 17.875,6.925 40.675,6.925 42.306,5.294 53.444,5.294 55.975,7.825 55.975,16.65 59.725,20.4 SW2.1
NetC3_2: C3.2 D3.1 R4.1 SW3.1 | length 92.3
  Top Layer w0.254: C3.2 18.012,13.938 19.938,13.938 R4.1
  Bottom Layer w0.254: v1(18.925,13.95) 16.525,13.95 14.65,12.075 14.65,8.65 17.675,5.625 21.8,5.625 23.425,4 73.126,4 76.069,6.942 76.069,17.019 79.45,20.4 SW3.1
NetC4_2: C4.2 D4.1 R5.1 SW4.1 | length 41.8
  Top Layer w0.254: C4.2 18.012,16.237 19.938,16.237 R5.1
  Bottom Layer w0.254: v1(18.925,16.25) 20.85,16.25 21.565,16.965 21.565,21.14 22.49,22.065 29.415,22.065 34.3,26.95 34.3,34.375 38.85,38.925 SW4.1
NetC5_2: C5.2 D5.1 R6.1 SW5.1 | length 64.4
  Top Layer w0.254: C5.2 18.012,18.762 19.938,18.762 R6.1
  Bottom Layer w0.254: v1(18.925,18.75) 17.95,18.75 17.125,17.925 17.125,15.875 17.642,15.358 22.241,15.358 24.138,17.255 33.355,17.255 39.575,23.475 49.325,23.475 54.725,28.875 54.725,34.025 59.625,38.925 SW5.1
NetC6_2: C6.2 D6.1 R7.1 SW6.1 | length 93.1
  Top Layer w0.254: C6.2 18.012,21.138 19.938,21.138 R7.1
  Bottom Layer w0.254: v1(18.9,21.15) 17.6,21.15 16,19.55 16,15.725 17.01,14.715 32.54,14.715 40.475,22.65 71.05,22.65 73.425,25.025 73.425,37.725 74.625,38.925 SW6.1
NetC7_2: C7.2 D7.1 R8.1 SW7.1 | length 49.3
  Top Layer w0.254: C7.2 18.012,24.987 19.938,24.987 R8.1
  Bottom Layer w0.254: v1(18.95,25) 20.3,25 20.875,25.575 20.875,29.85 23.52,32.495 26.47,32.495 36.55,42.575 36.55,55.55 38.9,57.9 SW7.1
NetC8_2: C8.2 D8.1 R9.1 SW8.1 | length 70.5
  Top Layer w0.254: C8.2 18.012,27.988 19.938,27.988 R9.1
  Bottom Layer w0.254: v1(18.925,27.975) 18.125,27.975 17.475,27.325 17.475,25.512 18.668,24.319 21.119,24.319 22.475,25.675 22.475,28.4 24.03,29.955 26.455,29.955 38.975,42.475 47.475,42.475 50.875,45.875 50.875,52.95 55.825,57.9 SW8.1
NetC9_2: C9.2 D9.1 R10.1 SW9.1 | length 96.1
  Top Layer w0.254: C9.2 18.05,30.975 19.9,30.975 R10.1
  Bottom Layer w0.254: v1(18.95,30.95) 18,30.95 16.475,29.425 16.475,24.825 17.875,23.425 22.225,23.425 23.57,24.77 23.57,26.847 24.138,27.415 25.94,27.415 39.9,41.375 69.425,41.375 74.45,46.4 74.45,54.825 77.525,57.9 SW9.1
NetC10_2: C10.2 D10.1 R11.1 SW10.1 | length 58.2
  Top Layer w0.254: C10.2 18.012,34.512 19.938,34.512 R11.1
  Bottom Layer w0.254: v1(18.95,34.475) 17.2,36.225 17.2,56.075 37.65,76.525 SW10.1
NetC11_2: C11.2 D11.1 R12.1 SW11.1 | length 74.7
  Top Layer w0.254: C11.2 17.975,39.775 v1(18.95,39.775) R12.1
  Bottom Layer w0.254: v1(18.95,39.775) 18.947,39.778 18.497,39.778 18.025,40.25 18.025,53.05 26.394,61.419 49.219,61.419 54.7,66.9 54.7,75.025 56.2,76.525 SW11.1
NetC12_2: C12.2 D12.1 R13.1 SW12.1 | length 89.5
  Top Layer w0.254: C12.2 18.012,43.338 19.938,43.338 R13.1
  Bottom Layer w0.254: v1(18.925,43.35) 18.925,50.142 28.808,60.025 72.225,60.025 74.776,62.576 74.776,74.276 77.025,76.525 SW12.1
NetD17_2: D17.2 U1.GP12 | length 32.7
  Top Layer w0.254: U1.GP12@26.046,43.79 28.035,43.79 29.417,42.408 29.417,16.608 30.575,15.45 D17.2
NetD29_2: D29.2 U1.GP15 | length 8.1
  Top Layer w0.254: D29.2 24.1,59.575 25.575,58.1 25.575,54.972 25.426,54.823 25.407,54.823 24.78,54.196 U1.GP15@24.78,53.95
NetQ1_1: Q1.1 R1.2 | length 2.3
  Top Layer w0.254: R1.2 5.19,60.715 5.19,61.065 5.825,61.7 Q1.1
NetR1_1: R1.1 U1.GP17 | length 14.1
  Top Layer w0.254: R1.1 3.975,59.65 1.575,57.25 1.575,53.925 4.09,51.41 U1.GP17@7,51.41
NetR2_2: R2.2 U1.GP0 | length 5.8
  Top Layer w0.254: R2.2 19.982,6.768 19.982,6.268 20.85,5.4 24.49,5.4 U1.GP0@24.78,5.69
NetR3_2: R3.2 U1.GP1 | length 5.4
  Top Layer w0.254: R3.2 20.55,9.225 21.75,8.025 24.575,8.025 U1.GP1@24.78,8.23
NetR4_2: R4.2 U1.GP2 | length 5.4
  Top Layer w0.254: R4.2 21.025,12.875 21.925,13.775 24.315,13.775 U1.GP2@24.78,13.31
NetR5_2: R5.2 U1.GP3 | length 5.1
  Top Layer w0.254: R5.2 22.55,15.175 23.225,15.85 U1.GP3@24.78,15.85
NetR6_2: R6.2 U1.GP4 | length 5.1
  Top Layer w0.254: R6.2 22.625,17.7 23.25,18.325 24.715,18.325 U1.GP4@24.78,18.39
NetR7_2: R7.2 U1.GP5 | length 5.2
  Top Layer w0.254: R7.2 22.125,20.075 22.98,20.93 U1.GP5@24.78,20.93
NetR8_2: R8.2 U1.GP6 | length 5.7
  Top Layer w0.254: R8.2 21.15,23.925 23.235,26.01 U1.GP6@24.78,26.01
NetR9_2: R9.2 U1.GP7 | length 5.5
  Top Layer w0.254: R9.2 21.15,26.925 22.775,28.55 U1.GP7@24.78,28.55
NetR10_2: R10.2 U1.GP8 | length 5.3
  Top Layer w0.254: R10.2 22.05,29.975 23.165,31.09 U1.GP8@24.78,31.09
NetR11_2: R11.2 U1.GP9 | length 4.9
  Top Layer w0.254: R11.2 24.6,33.45 U1.GP9@24.78,33.63
NetR12_2: R12.2 U1.GP10 | length 4.8
  Top Layer w0.254: R12.2 24.765,38.725 U1.GP10@24.78,38.71
NetR13_2: R13.2 U1.GP11 | length 5.6
  Top Layer w0.254: R13.2 20.875,42.275 22.275,40.875 24.405,40.875 U1.GP11@24.78,41.25
RUN: U1.RUN
SW2: D17.4 D18.2 | length 21.4
  Top Layer w0.254: D17.4 36.749,10.55 39.068,8.231 46.15,8.231 51.65,13.731 D18.2
SW3: D18.4 D19.2 | length 21.8
  Top Layer w0.254: D18.4 57.765,10.45 60.49,7.725 65.394,7.725 71.175,13.506 D19.2
SW4: D19.4 D20.2 | length 27.9
  Top Layer w0.254: D20.2 72,34.025 77.5,28.525 77.5,16.549 74.375,13.424 D19.4
SW5: D20.4 D21.2 | length 23.5
  Top Layer w0.254: D21.2 54.875,27.85 57.2,25.525 70.75,25.525 73.727,28.502 73.977,28.502 74.35,28.875 D20.4
SW6: D21.4 D22.2 | length 22.2
  Top Layer w0.254: D22.2 35.75,29.15 38.275,26.625 46.55,26.625 51.675,31.75 D21.4
SW7: D22.4 D23.2 | length 20.2
  Top Layer w0.254: D23.2 31.65,50.375 30.175,48.9 30.175,41.775 31.775,40.175 D22.4
SW8: D23.4 D24.2 | length 22.2
  Top Layer w0.254: D23.4 36.725,48.075 39.069,45.731 47.256,45.731 51.475,49.95 D24.2
SW9: D24.4 D25.2 | length 23.3
  Top Layer w0.254: D24.4 54.675,46.45 55.45,45.675 73.625,45.675 74.375,46.425 D25.2
SW10: D25.4 D26.2 | length 15.1
  Top Layer w0.254: D25.4 71.175,60.05 74.5,63.375 D26.2
SW11: D26.4 D27.2 | length 22.1
  Top Layer w0.254: D27.2 56.3,66.575 58.519,64.356 67.081,64.356 71.3,68.575 D26.4
SW12: D27.4 D28.2 | length 22
  Top Layer w0.254: D28.2 36.975,66.625 39.244,64.356 46.931,64.356 51.475,68.9 D27.4
SW14: D29.4 D30.2 | length 7.8
  Top Layer w0.254: D30.2 16.358,61.058 16.358,63.108 19.2,65.95 D29.4
SW15: D30.4 D31.2 | length 6.2
  Top Layer w0.254: D30.4 13.357,66.157 13.357,66.932 16.243,69.818 16.243,70.693 D31.2
SW16: D31.4 D32.2 | length 13.7
  Top Layer w0.254: D31.4 13.15,75.45 13.523,75.077 13.773,75.077 15.8,73.05 22.9,73.05 24.1,71.85 D32.2
pads on no net: BZ1.3 BZ1.4 D28.4 D32.4 MH1. MH2. MH3. MH4. SW1. SW2. SW3. SW4. SW5. SW6. SW7. SW8. SW9. SW10. SW11. SW12. U1.3V3_EN U1.ADC_VREF U1.GP13 U1.GP14 U1.GP16 U1.GP18 U1.GP19 U1.GP20 U1.GP21 U1.GP22 U1.GP26_A0 U1.GP27_A1 U1.GP28_A2 U1.VBUS U1.VSYS

## Polygon pours and split planes (outlines as drawn)
GND on Bottom Layer "NONET_L01_P-001" (solid, remove dead copper, pour order 0): -1.125,82.375 95.225,82.375 95.225,1.75 -1.125,1.75
+3V3 on Top Layer "+3V3_L01_P019" (solid, remove dead copper, pour order 19): -1.75,81.75 93.7,81.75 93.7,2.575 -2.575,2.575 -2.575,9.4

## Keep-outs
Keep-Out Layer:
  circle w0.254: c42.65,73.025 r1.786
  circle w0.254: c45.2,66.65 r1.786
  circle w0.254: c42.65,54.4 r1.786
  circle w0.254: c45.2,48.025 r1.786
  circle w0.254: c45.2,29.05 r1.786
  circle w0.254: c42.65,35.425 r1.786
  circle w0.254: c62.4,35.425 r1.786
  circle w0.254: c64.95,29.05 r1.786
  circle w0.254: c64.95,48.025 r1.786
  circle w0.254: c62.4,54.4 r1.786
  circle w0.254: c64.95,66.65 r1.786
  circle w0.254: c62.4,73.025 r1.786
  circle w0.254: c81.925,73.025 r1.786
  circle w0.254: c84.475,66.65 r1.786
  circle w0.254: c81.925,54.4 r1.786
  circle w0.254: c84.475,48.025 r1.786
  circle w0.254: c81.925,35.425 r1.786
  circle w0.254: c84.475,29.05 r1.786
  circle w0.254: c84.475,10.525 r1.786
  circle w0.254: c81.925,16.9 r1.786
  circle w0.254: c64.95,10.525 r1.786
  circle w0.254: c62.4,16.9 r1.786
  circle w0.254: c45.2,10.525 r1.786
  circle w0.254: c42.65,16.9 r1.786
  circle w0.5: c40,69.125 r2.575
  circle w0.5: c59.75,69.125 r2.575
  circle w0.5: c79.275,69.125 r2.575
  circle w0.5: c79.275,50.5 r2.575
  circle w0.5: c59.75,50.5 r2.575
  circle w0.5: c40,50.5 r2.575
  circle w0.5: c40,31.525 r2.575
  circle w0.5: c59.75,31.525 r2.575
  circle w0.5: c79.275,31.525 r2.575
  circle w0.5: c79.275,13 r2.575
  circle w0.5: c59.75,13 r2.575
  circle w0.5: c40.025,13 r2.575
  lines w0.5: 2.847,79.472 ccw(c0.65,79.35) 2.85,79.35 ; 2.897,4.847 ccw(c0.7,4.725) 2.9,4.725 ; 93.312,79.326 ccw(c91.116,79.204) 93.316,79.204 ; 93.472,4.847 ccw(c91.275,4.725) 93.475,4.725
  lines w1: -2,4.125 ccw(c0.125,4.125) 0.125,2 7,2 8.766,2.001 11.355,4.591 20.209,4.591 22.799,2 25,2 91.7,2 ccw(c91.7,4.3) 94,4.3 94,78.525 ccw(c90.525,78.525) 90.525,82 0.05,82 ccw(c0.05,79.95) -2,79.95 -2,4.125

## Silkscreen, mask and mechanical layers (free items; w line width, h text height)
Top Overlay:
  the board outline again, w0.8
Bottom Overlay:
  the board outline again, w0.8
  text "https://github.com/nivuciis/MacroPlay-HW" at 20.125,48.076 h1.2
  text "Vinicius RM Carvalho and Thiago F Laurentino - MacroPlay V1" at 86.808,2.876 h2
Manufacturing Notes:
  drawing of 198 lines, arcs and shapes, not listed
  text "MANUFACTURING NOTES" at 63,189 h3
  text "BOARD INFO" at 113,182.084 h1.5
  text "FILES" at 64,181.476 h1.5
  text "GTO - Top Overlay" at 64,177.996 h1.5
  text "Minimum Track: 0.0762mm (3mil)" at 113,177.084 h1.5
  text "GTP - Top Paste" at 64,175.084 h1.5
  text "Minimum Clearance: 0.0762mm (3mil)" at 113,173.084 h1.5
  text "GTS - Top Solder" at 64,172.084 h1.5
  text "GTL - L1 (Positive)" at 64,169.084 h1.5
  text "Minimum Through Hole VIA: 0.6mm (23.62mil) (pad) / 0.3mm (11.8mil) (Drill)" at 113,169 h1.5
  text "G1  - L2 (Positive)" at 64,166.084 h1.5
  text "Drilling: L1-L4" at 113,165.084 h1.5
  text "G2  - L3 (Positive)" at 64,163.084 h1.5
  text "GBL - L4 (Positive)" at 64,160.084 h1.5
  text "RF TRACK ANTENNA (COPLANAR WAVEGUIDE):" at 113,158.084 h1.5
  text "GBS - Bottom Solder" at 64,157.084 h1.5
  text "GBP - Bottom Paste" at 64,154.084 h1.5
  text "Impedance Target: 50 ohm" at 113,154.084 h1.5
  text "GBO - Bottom Overlay" at 64,151 h1.5
  text "Track Width: 0.21mm (8.26mil)" at 113,150.084 h1.5
  text "GM3 - Manufacturing Notes" at 64,148 h1.5
  text "Gap: 0.15mm (5.90mil)" at 113,146.084 h1.5
  text "GM28 - Board Outline" at 64,145 h1.5
  text "Height(Reference L2): 0.11mm (4.33mil)" at 113,142.084 h1.5
  text "Dielectric Constant: 4.29" at 113,138.084 h1.5
  text "STACKUP BOARD" at 113,131 h2.5
  text "Board Layer Stack" at 114.77,126.81 h1.52
  text "Layer" at 143.21,126.81 h1.52
  text "Name" at 153.622,126.81 h1.52
  text "Material" at 177.237,126.81 h1.52
  text "Thickness" at 199.075,126.81 h1.52
  text "Constant" at 215.581,126.81 h1.52
  text "Top Overlay" at 153.622,123.762 h1.52
  text "Top Solder" at 153.622,120.714 h1.52
  text "Solder Resist" at 177.237,120.714 h1.52
  text "0,010mm" at 199.075,120.714 h1.52
  text "3.5" at 215.581,120.714 h1.52
  text "1" at 143.21,117.666 h1.52
  text "Top Layer" at 153.622,117.666 h1.52
  text "CF-001" at 177.237,117.666 h1.52
  text "0,035mm" at 199.075,117.666 h1.52
  text "Dielectric 1" at 153.622,114.618 h1.52
  text "Core-043" at 177.237,114.618 h1.52
  text "1,499mm" at 199.075,114.618 h1.52
  text "4.3" at 215.581,114.618 h1.52
  text "2" at 143.21,111.57 h1.52
  text "Bottom Layer" at 153.622,111.57 h1.52
  text "CF-001" at 177.237,111.57 h1.52
  text "0,035mm" at 199.075,111.57 h1.52
  text "Bottom Solder" at 153.622,108.522 h1.52
  text "Solder Resist" at 177.237,108.522 h1.52
  text "0,010mm" at 199.075,108.522 h1.52
  text "3.5" at 215.581,108.522 h1.52
  text "Bottom Overlay" at 153.622,105.474 h1.52
  text "'.TitleProject'" at 162.495,93.084 h1.5
  text "'.VersionRevision'" at 196.495,93.084 h1.5
  text "'.Company'" at 162.495,88.559 h1.5
  text "'.VariantName'" at 162.495,84.559 h1.5
Drill Drawing:
  circle w0.254: c183.375,154.246 r0.847
  lines w0.254: 182.528,141.969 182.528,142.392 182.952,142.816 182.528,143.239 182.528,143.662 182.952,143.662 183.375,143.239 183.798,143.662 184.222,143.662 184.222,143.239 183.798,142.816 184.222,142.392 184.222,141.969 183.798,141.969 183.375,142.392 182.952,141.969 182.528,141.969 ; 182.528,146.202 182.952,146.202 183.375,145.779 183.798,146.202 184.222,146.202 183.798,146.626 184.222,147.049 183.798,147.049 183.375,147.472 182.952,147.049 182.528,147.049 182.952,146.626 182.528,146.202 ; 182.528,149.589 184.222,149.589 184.222,151.282 182.528,151.282 182.528,149.589 ; 182.528,157.209 183.375,157.632 184.222,157.209 183.798,158.056 184.222,158.902 183.375,158.479 182.528,158.902 182.952,158.056 182.528,157.209 ; 182.528,161.442 182.952,161.442 182.952,161.019 183.798,161.019 183.798,161.442 184.222,161.442 184.222,162.289 183.798,162.289 183.798,162.712 182.952,162.712 182.952,162.289 182.528,162.289 182.528,161.442
  lines w0.381: 181.01,140.826 362.621,140.826 ; 181.01,163.686 362.621,163.686 ; 195.002,137.016 195.002,167.496 ; 209.73,137.016 209.73,167.496 ; 238.931,137.016 238.931,167.496 ; 251.781,137.016 251.781,167.496 ; 270.419,137.016 270.419,167.496 ; 308.508,137.016 308.508,167.496 ; 323.49,137.016 323.49,167.496 ; 342.433,137.016 342.433,167.496 ; 181.01,137.016 362.621,137.016 362.621,167.496 181.01,167.496 181.01,137.016
  text "Symbol" at 183.296,164.829 h1.83
  text "Count" at 196.145,164.829 h1.83
  text "Hole Size" at 210.873,164.829 h1.83
  text "Plated" at 240.074,164.829 h1.83
  text "Hole Type" at 252.924,164.829 h1.83
  text "Drill Layer Pair" at 271.562,164.829 h1.83
  text "Via/Pad" at 309.651,164.829 h1.83
  text "Pad Shape" at 324.633,164.829 h1.83
  text "Template" at 343.576,164.829 h1.83
  text "2" at 196.145,161.019 h1.52
  text "0.800mm (31.50mil)" at 210.873,161.019 h1.52
  text "PTH" at 240.074,161.019 h1.52
  text "Round" at 252.924,161.019 h1.52
  text "Top Layer - Bottom Layer" at 271.562,161.019 h1.52
  text "Pad" at 309.651,161.019 h1.52
  text "Rounded" at 324.633,161.019 h1.52
  text "c131h80m151" at 343.576,161.019 h1.52
  text "4" at 196.145,157.209 h1.52
  text "3.400mm (133.86mil)" at 210.873,157.209 h1.52
  text "NPTH" at 240.074,157.209 h1.52
  text "Round" at 252.924,157.209 h1.52
  text "Top Layer - Bottom Layer" at 271.562,157.209 h1.52
  text "Pad" at 309.651,157.209 h1.52
  text "Rounded" at 324.633,157.209 h1.52
  text "c0hn340" at 343.576,157.209 h1.52
  text "12" at 196.145,153.399 h1.52
  text "4.089mm (161.00mil)" at 210.873,153.399 h1.52
  text "NPTH" at 240.074,153.399 h1.52
  text "Round" at 252.924,153.399 h1.52
  text "Top Layer - Bottom Layer" at 271.562,153.399 h1.52
  text "Pad" at 309.651,153.399 h1.52
  text "Rounded" at 324.633,153.399 h1.52
  text "(Mixed)" at 343.576,153.399 h1.52
  text "24" at 196.145,149.589 h1.52
  text "3.000mm (118.11mil)" at 210.873,149.589 h1.52
  text "NPTH" at 240.074,149.589 h1.52
  text "Round" at 252.924,149.589 h1.52
  text "Top Layer - Bottom Layer" at 271.562,149.589 h1.52
  text "Pad" at 309.651,149.589 h1.52
  text "Rounded" at 324.633,149.589 h1.52
  text "c300hn300" at 343.576,149.589 h1.52
  text "39" at 196.145,145.779 h1.52
  text "0.300mm (11.81mil)" at 210.873,145.779 h1.52
  text "PTH" at 240.074,145.779 h1.52
  text "Round" at 252.924,145.779 h1.52
  text "Top Layer - Bottom Layer" at 271.562,145.779 h1.52
  text "Via" at 309.651,145.779 h1.52
  text "Rounded" at 324.633,145.779 h1.52
  text "v60h30m0mx0" at 343.576,145.779 h1.52
  text "40" at 196.145,141.969 h1.52
  text "1.200mm (47.24mil)" at 210.873,141.969 h1.52
  text "PTH" at 240.074,141.969 h1.52
  text "Round" at 252.924,141.969 h1.52
  text "Top Layer - Bottom Layer" at 271.562,141.969 h1.52
  text "Pad" at 309.651,141.969 h1.52
  text "Rounded" at 324.633,141.969 h1.52
  text "(Mixed)" at 343.576,141.969 h1.52
  text "121 Total" at 196.145,138.159 h1.52
Board Outline:
  the board outline again, w0.1